# Altium PCB pcb.PcbDoc
Units mm, origin at the board's own origin, x right, y up, seen from the top; angles counter-clockwise.
Board outline 61.34 x 34.54 mm, 2 copper layers (Top Layer, Bottom Layer); 8 components, 2 nets, 20 pads, 0 vias.
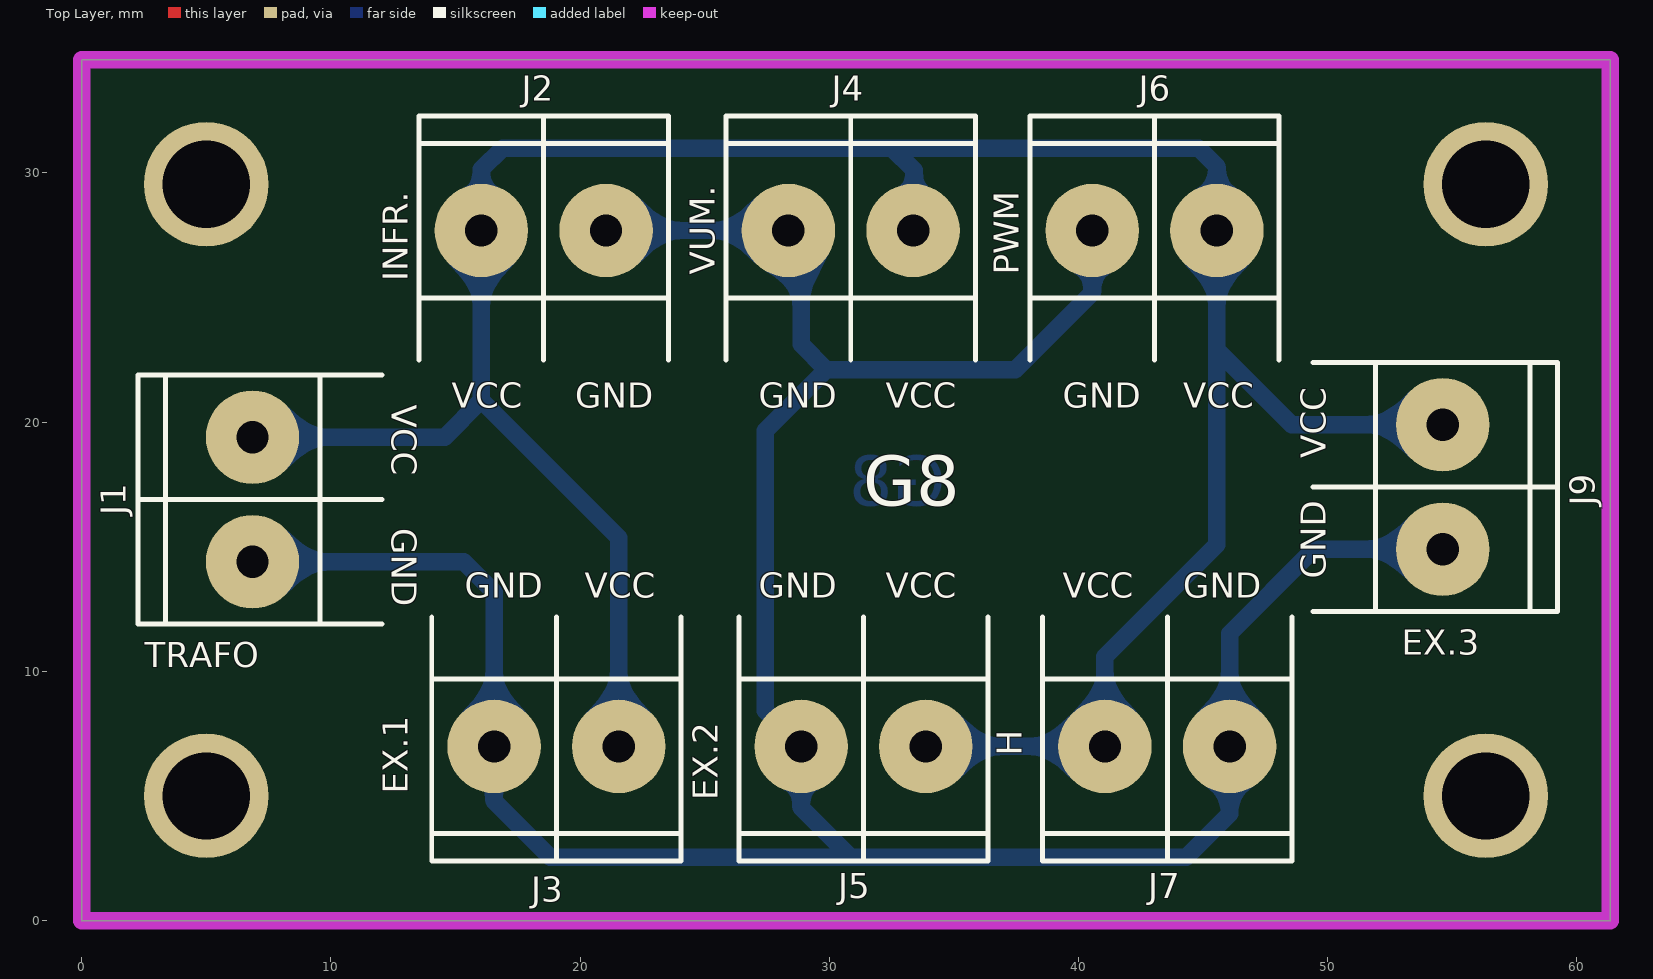
[diagram p0: Top Layer view]
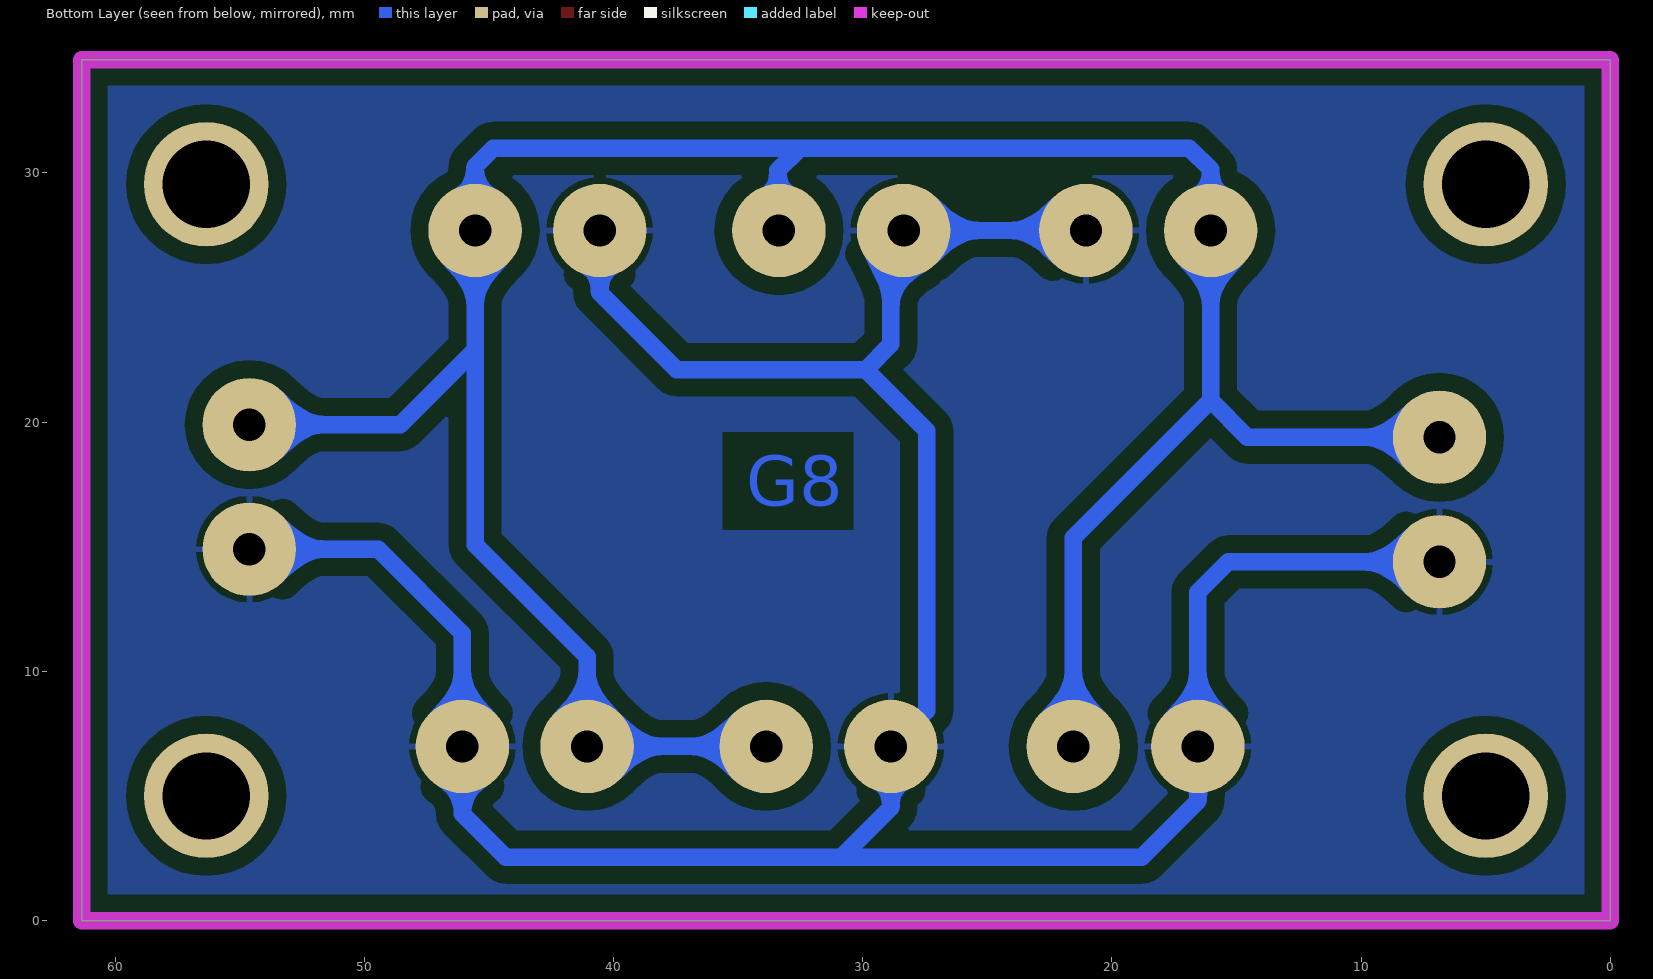
[diagram p1: Bottom Layer view, seen from below]
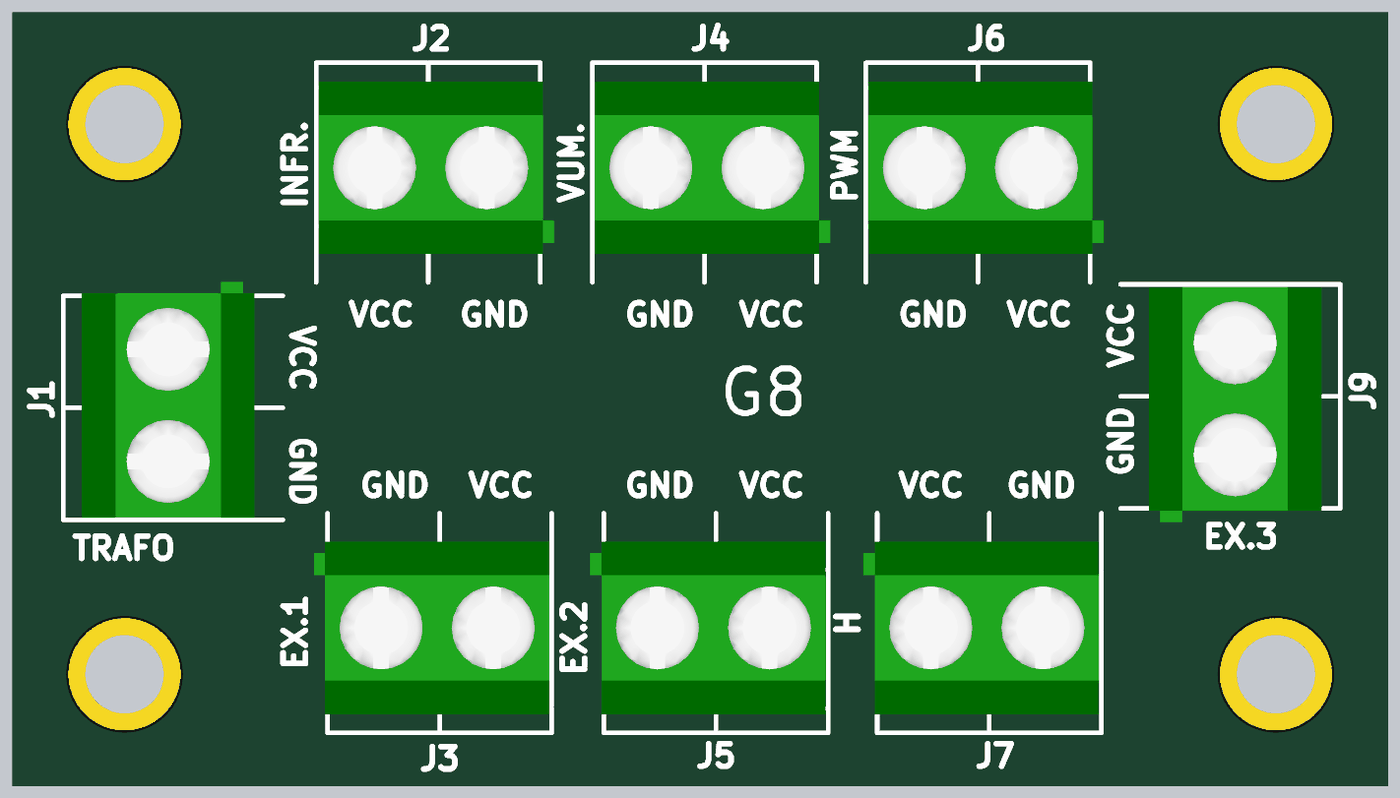
[diagram p2: 3D render of the assembled board from above, using the file's embedded part models]

## Layer stack, top to bottom
Top Solder: solder mask 0.0102, Solder Resist, Dk 3.5
Top Layer: signal copper 0.0356
Dielectric 1: dielectric 0.32, FR-4, Dk 4.8
Bottom Layer: signal copper 0.0356
Bottom Solder: solder mask 0.0102, Solder Resist, Dk 3.5

## Board outline
0,0 61.341,0 61.341,34.544 0,34.544

## Design rules (kind name [scope] priority, off if disabled: settings)
Clearance POLYGON [All] p1: gap=0.7
Clearance [All] p2: gap=0.3
PolygonConnect [All] p1: connectstyle=Relief reliefconductorwidth=0.254 reliefentries=4 polygonreliefangle="90 Angle" airgapwidth=0.254
RoutingVias [All] p1: holewidth=0.711 width=1.27 viastyle="Through Hole" minholewidth=0.711 minwidth=1.27 maxholewidth=0.711 maxwidth=1.27
SolderMaskExpansion [All] p1: expansion=0.102
UnpouredPolygon [All] p1: allowunpoured=FALSE
Width [All] p1: maxlimit=0.7 minlimit=0.254 preferedwidth=0.7 toplayer_maxwidth=0.254 toplayer_prefwidth=0.254 bottomlayer_minwidth=0.7 minimp=50.000000 maximp=50.000000 favimp=50.000000
29 further rules are at their usual default settings.

## Components (designator, comment, footprint, x,y, rotation, side; value= is the part's Value field where it differs from the comment)
J1 "TRAFO" BORNERA2 6.858,16.891 r0 top
J2 "INFR." BORNERA2 18.542,27.686 r270 top
J3 "EX.1" BORNERA2 19.049,6.985 r90 top
J4 "VUM." BORNERA2 30.861,27.686 r270 top
J5 "EX.2" BORNERA2 31.368,6.985 r90 top
J6 "PWM" BORNERA2 43.054,27.686 r270 top
J7 "H" BORNERA2 43.561,6.985 r90 top
J9 "EX.3" BORNERA2 54.61,17.398 r180 top

## Footprints (in the part's own frame and the unit in brackets; to place one, negate y for a bottom-side part, rotate by r counter-clockwise, add the part's x,y. Pads: shape width x height; smd on the part's side, far side on the other; paste and mask are expansions set on the pad)
BORNERA2 [mm] "Bornera con Tornillos 5mm separación"
  round 3.75 hole 1.3: 1(0,2.5) 2(0,-2.5)
  silkscreen extent -4.6,-5 5.2,5, body extent -3.76,-4.89 3.94,5.61, height 10

## Part data
J1 J2 J3 J4 J5 J6 J7 J9: library part "BORNERA 2"

## Free pads (board coordinates)
  round 5 hole 3.5: 0(5,29.544) 1(5,5) 2(56.341,5) 3(56.341,29.544)

## Nets (pads, with @x,y where several pads share a name; then routed paths per layer and width w, separated by ;. In a path a pad name is that pad's centre, name@x,y a point inside that pad or via, vN(x,y) a via of type N, cw(c..) or ccw(c..) an arc to the next point about the centre after c; other vN are vias at no path point)
GND: J1.2 J2.1 J3.1 J4.2 J5.1 J6.2 J7.2 J9.1 | length 116.9
  Bottom Layer w0.7: J1.2 15.327,14.391 16.549,13.169 J3.1 16.549,4.787 18.796,2.54 30.861,2.54 ; J2.1 J4.2 28.868,27.179 28.868,23.114 29.884,22.098 ; J6.2 40.554,25.187 37.465,22.098 29.884,22.098 ; J9.1 49.442,14.898 46.061,11.517 J7.2 46.061,4.278 44.323,2.54 30.861,2.54 ; 29.884,22.098 27.432,19.646 27.432,8.421 J5.1 28.868,4.533 30.861,2.54
VCC: J1.1 J2.2 J3.2 J4.1 J5.2 J6.1 J7.1 J9.2 | length 111.7
  Bottom Layer w0.7: J1.1 14.565,19.391 16.042,20.868 ; J3.2 21.549,15.361 16.042,20.868 ; J4.1 33.401,27.726 33.401,30.099 32.512,30.988 ; J5.2 J7.1 41.061,10.581 45.554,15.074 45.554,22.899 ; J9.2 48.555,19.898 45.554,22.899 ; 16.042,20.868 J2.2 16.042,30.139 16.891,30.988 32.512,30.988 ; 32.512,30.988 44.831,30.988 45.554,30.265 J6.1 45.554,22.899

## Polygon pours and split planes (outlines as drawn)
GND on Bottom Layer "POLYGON" (solid, remove dead copper, pour order 6): -6.731,37.846 -6.477,37.592 65.913,37.592 65.913,-5.715 65.659,-5.969 63.373,-3.683 0,-3.683

## Keep-outs
Keep-Out Layer:
  the board outline again, w0.7

## Other copper
Bottom Layer:
  text "G8" at 34.671,16.637 h2

## Silkscreen, mask and mechanical layers (free items; w line width, h text height)
Top Overlay:
  text "VCC" at 12.446,20.701 h1 r270
  text "VCC" at 14.859,20.574 h1
  text "GND" at 19.812,20.574 h1
  text "GND" at 27.178,20.574 h1
  text "VCC" at 32.258,20.574 h1
  text "GND" at 39.37,20.574 h1
  text "VCC" at 44.196,20.574 h1
  text "VCC" at 49.911,18.542 h1 r90
  text "G8" at 31.369,16.637 h2
  text "GND" at 12.446,15.748 h1 r270
  text "GND" at 49.911,13.716 h1 r90
  text "GND" at 15.367,12.954 h1
  text "VCC" at 20.193,12.954 h1
  text "GND" at 27.178,12.954 h1
  text "VCC" at 32.258,12.954 h1
  text "VCC" at 39.37,12.954 h1
  text "GND" at 44.196,12.954 h1